# EAGLE board TinyNES_Enclosure_Rear (EAGLE 9.6.2)
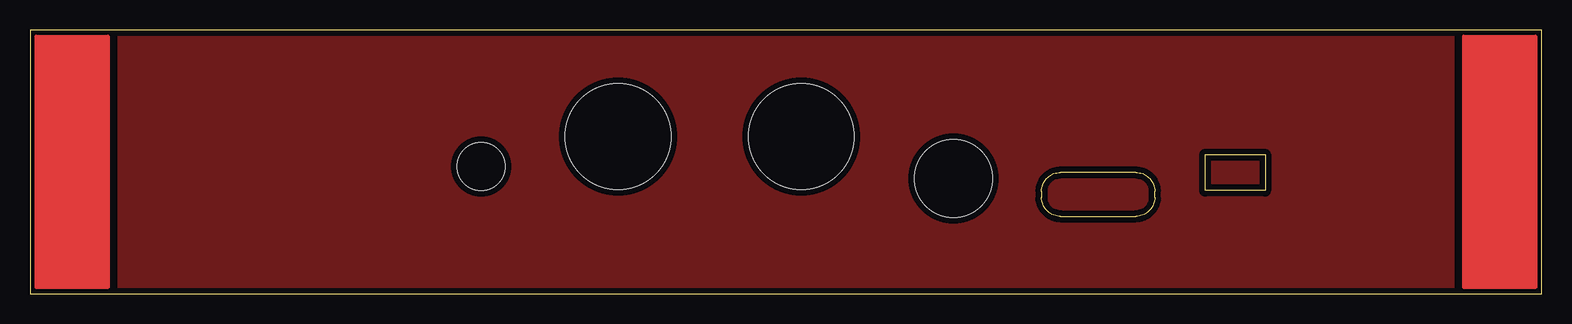
[diagram p0: board, top side]
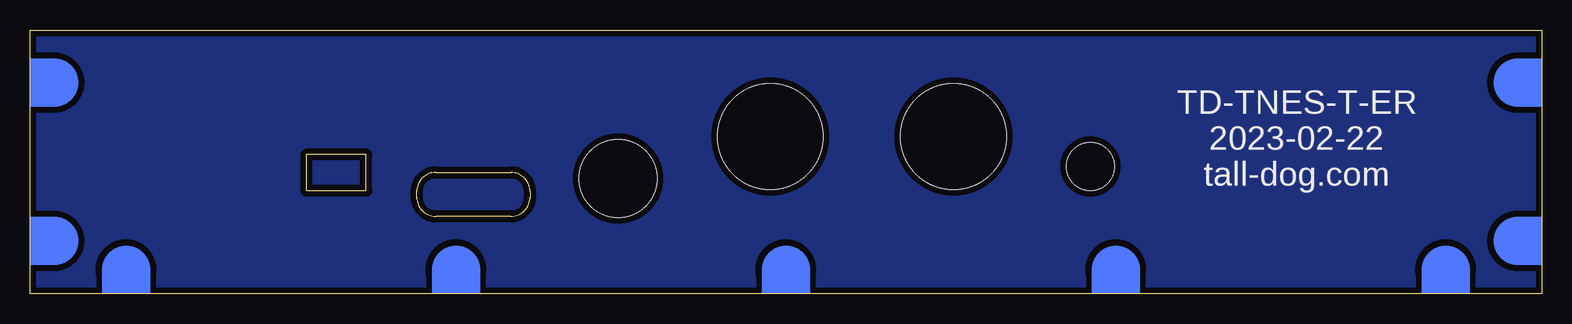
[diagram p1: board, bottom side, seen from below]

Size 126 x 22 mm. Coordinates in mm from the lower left corner, seen from the top.
Outline: 126,0 126,22 0,22 0,0 126,0
Outline: 92.18,10.11 85.9,10.11 arc90 84.32,8.53 84.32,8.03 arc90 85.9,6.45 92.18,6.45 arc90 93.76,8.03 93.76,8.53 arc90 92.18,10.11
Outline: 102.96,8.6 97.96,8.6 97.96,11.6 102.96,11.6 102.96,8.6
Copper layers (1*16): Top 0.035mm / dielectric 1.5mm / Bottom 0.035mm
Design rules "default *": minimum track width 6mil, minimum drill 0.35mm, track to track 6mil, track to pad 6mil, pad to pad 6mil, via to via 6mil, smd to smd 6mil, copper to edge 20mil, drill to drill 6mil, minimum pad ring 10mil, minimum via ring 8mil, stop-mask expansion 0mil, vias tented up to drill 0mil, thermal gap 10mil
Holes 8.8 mm at 64.29,13.1 49.03,13.1
Holes 4 mm at 37.6,10.6
Holes 6.5 mm at 76.97,9.6

## Placement (x,y rotation side)
E$11  [_ENCLOSURE-PATTERN]  122.5,11 0 top
E$36  [_ENCLOSURE-PATTERN]  3.5,11 0 top
E$71  [_ENCLOSURE-SOLDER-POINT]  126,17.6 90 bottom
E$72  [_ENCLOSURE-SOLDER-POINT]  126,4.4 90 bottom
E$73  [_ENCLOSURE-SOLDER-POINT]  0,17.6 270 bottom
E$74  [_ENCLOSURE-SOLDER-POINT]  0,4.4 270 bottom
E$75  [_ENCLOSURE-SOLDER-POINT]  118,0 180 bottom
E$76  [_ENCLOSURE-SOLDER-POINT]  90.5,0 180 bottom
E$77  [_ENCLOSURE-SOLDER-POINT]  63,0 180 bottom
E$78  [_ENCLOSURE-SOLDER-POINT]  35.5,0 180 bottom
E$79  [_ENCLOSURE-SOLDER-POINT]  8,0 180 bottom

## Library data of the parts
E$11 E$36 E$71-E$79 = TinyNES_Library

## Tracks (layer width: path | path; a pad name or v marks a point on that pad's centre or on a via)
GND
  pour Top (isolate 0.508): 118.5,22 7.5,22 7.5,0 118.5,0
  pour Bottom (isolate 0.508): 126,22 0,22 0,0 126,0

## Text on the board
bPlace: TD-TNES-T-ER / 2023-02-22 / tall-dog.com
tStop: (TRRS) | RESET | VIDEO | AUDIO | ON← | 3×CH | POWER